# Altium PCB UC-520.PcbDoc
Units mil, origin at the board's own origin, x right, y up, seen from the top; angles counter-clockwise.
Board outline 1574.8 x 1574.8 mil, 4 copper layers (Top Layer, VCC_3.3V, GND, Bottom Layer); 61 components, 27 nets, 224 pads, 121 vias.
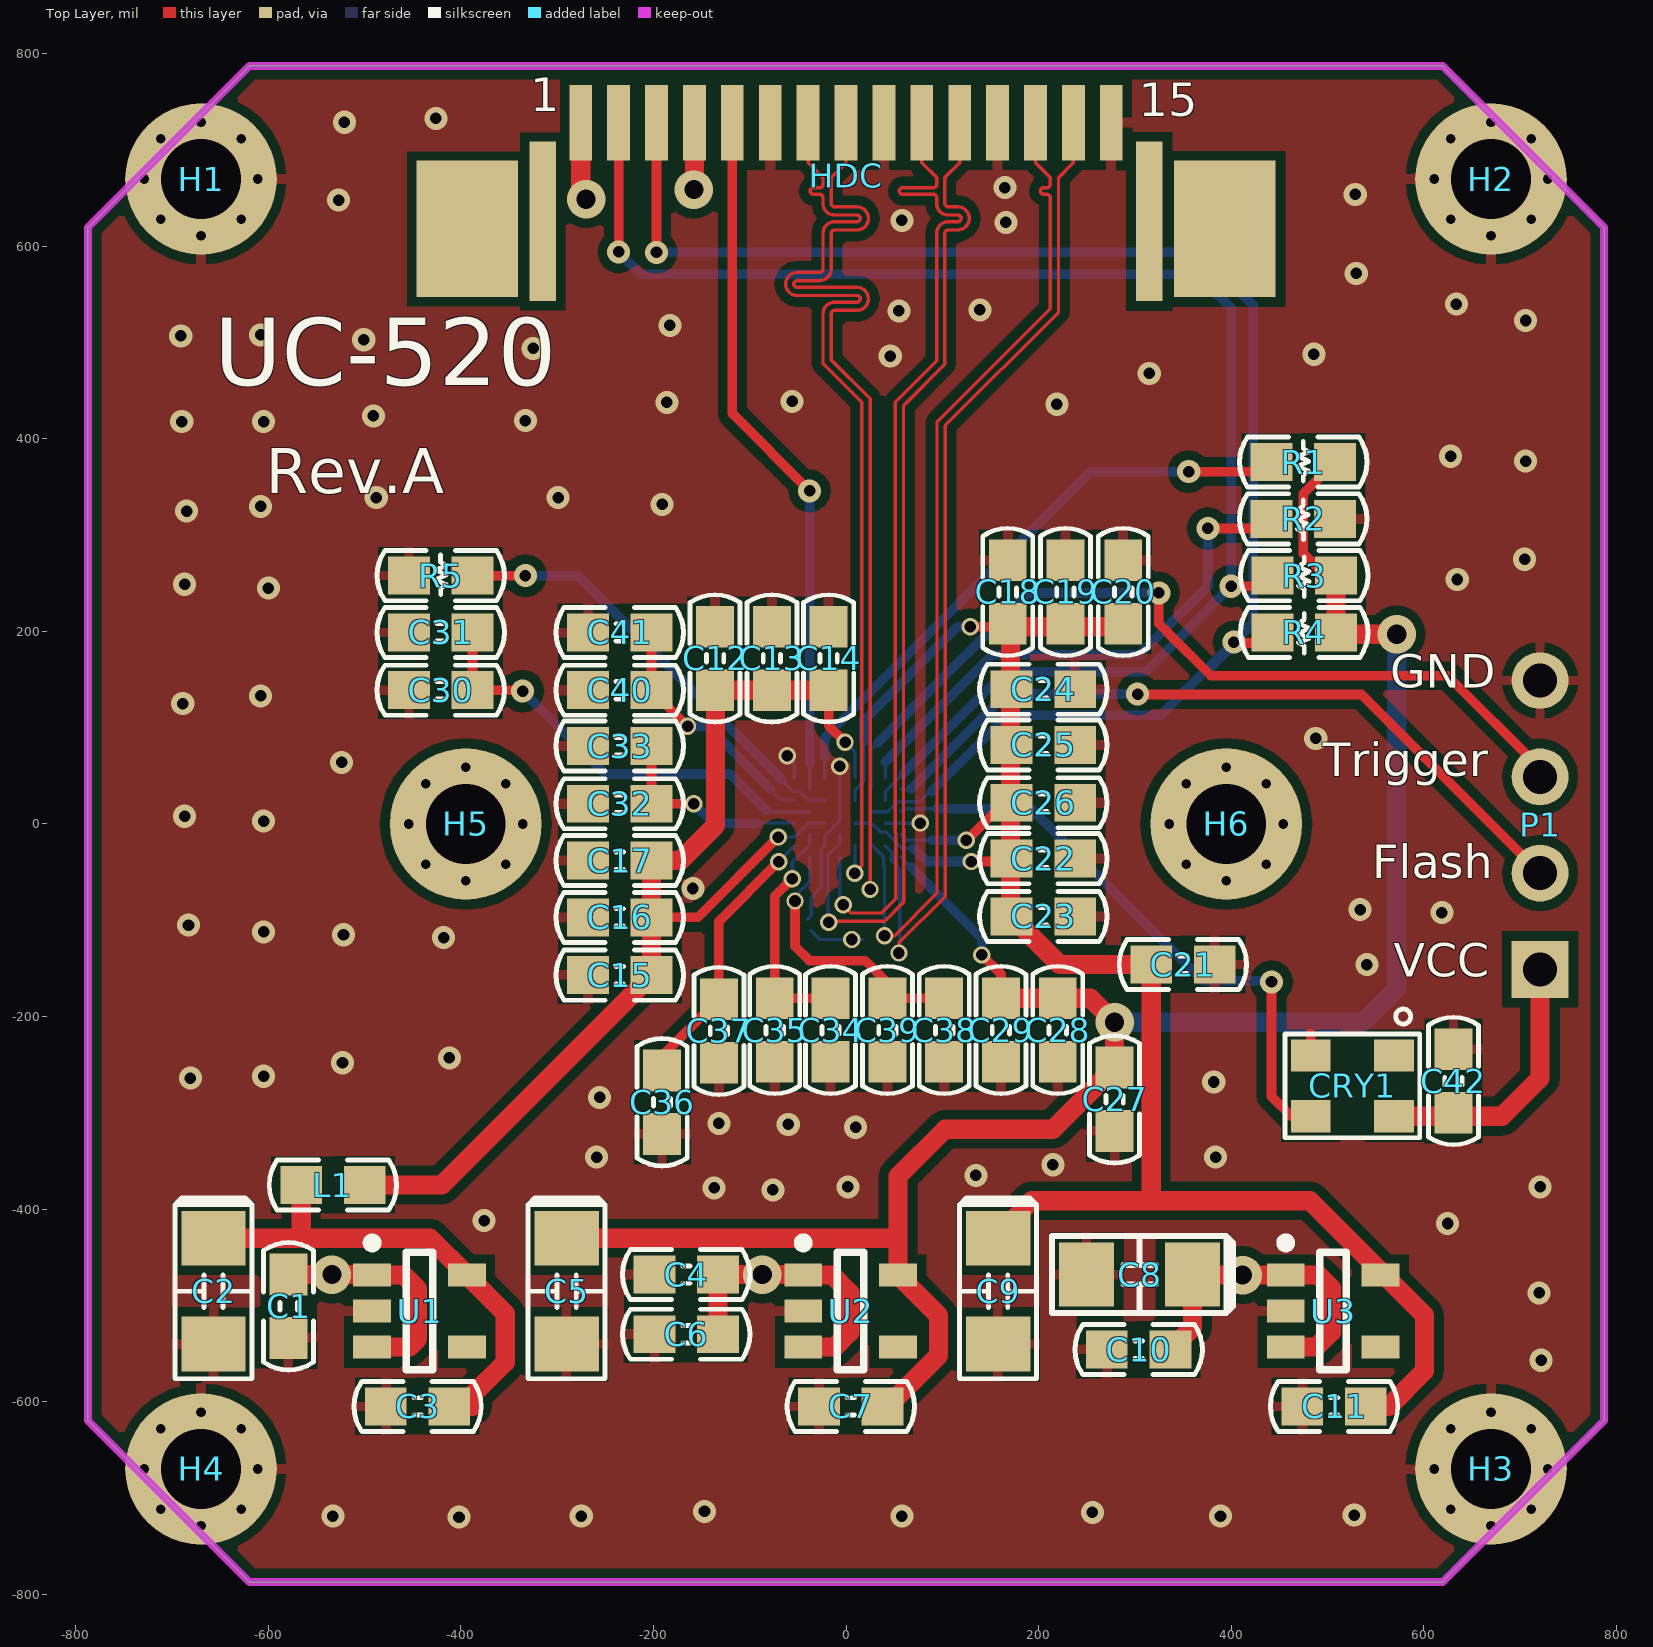
[diagram p0: Top Layer view]
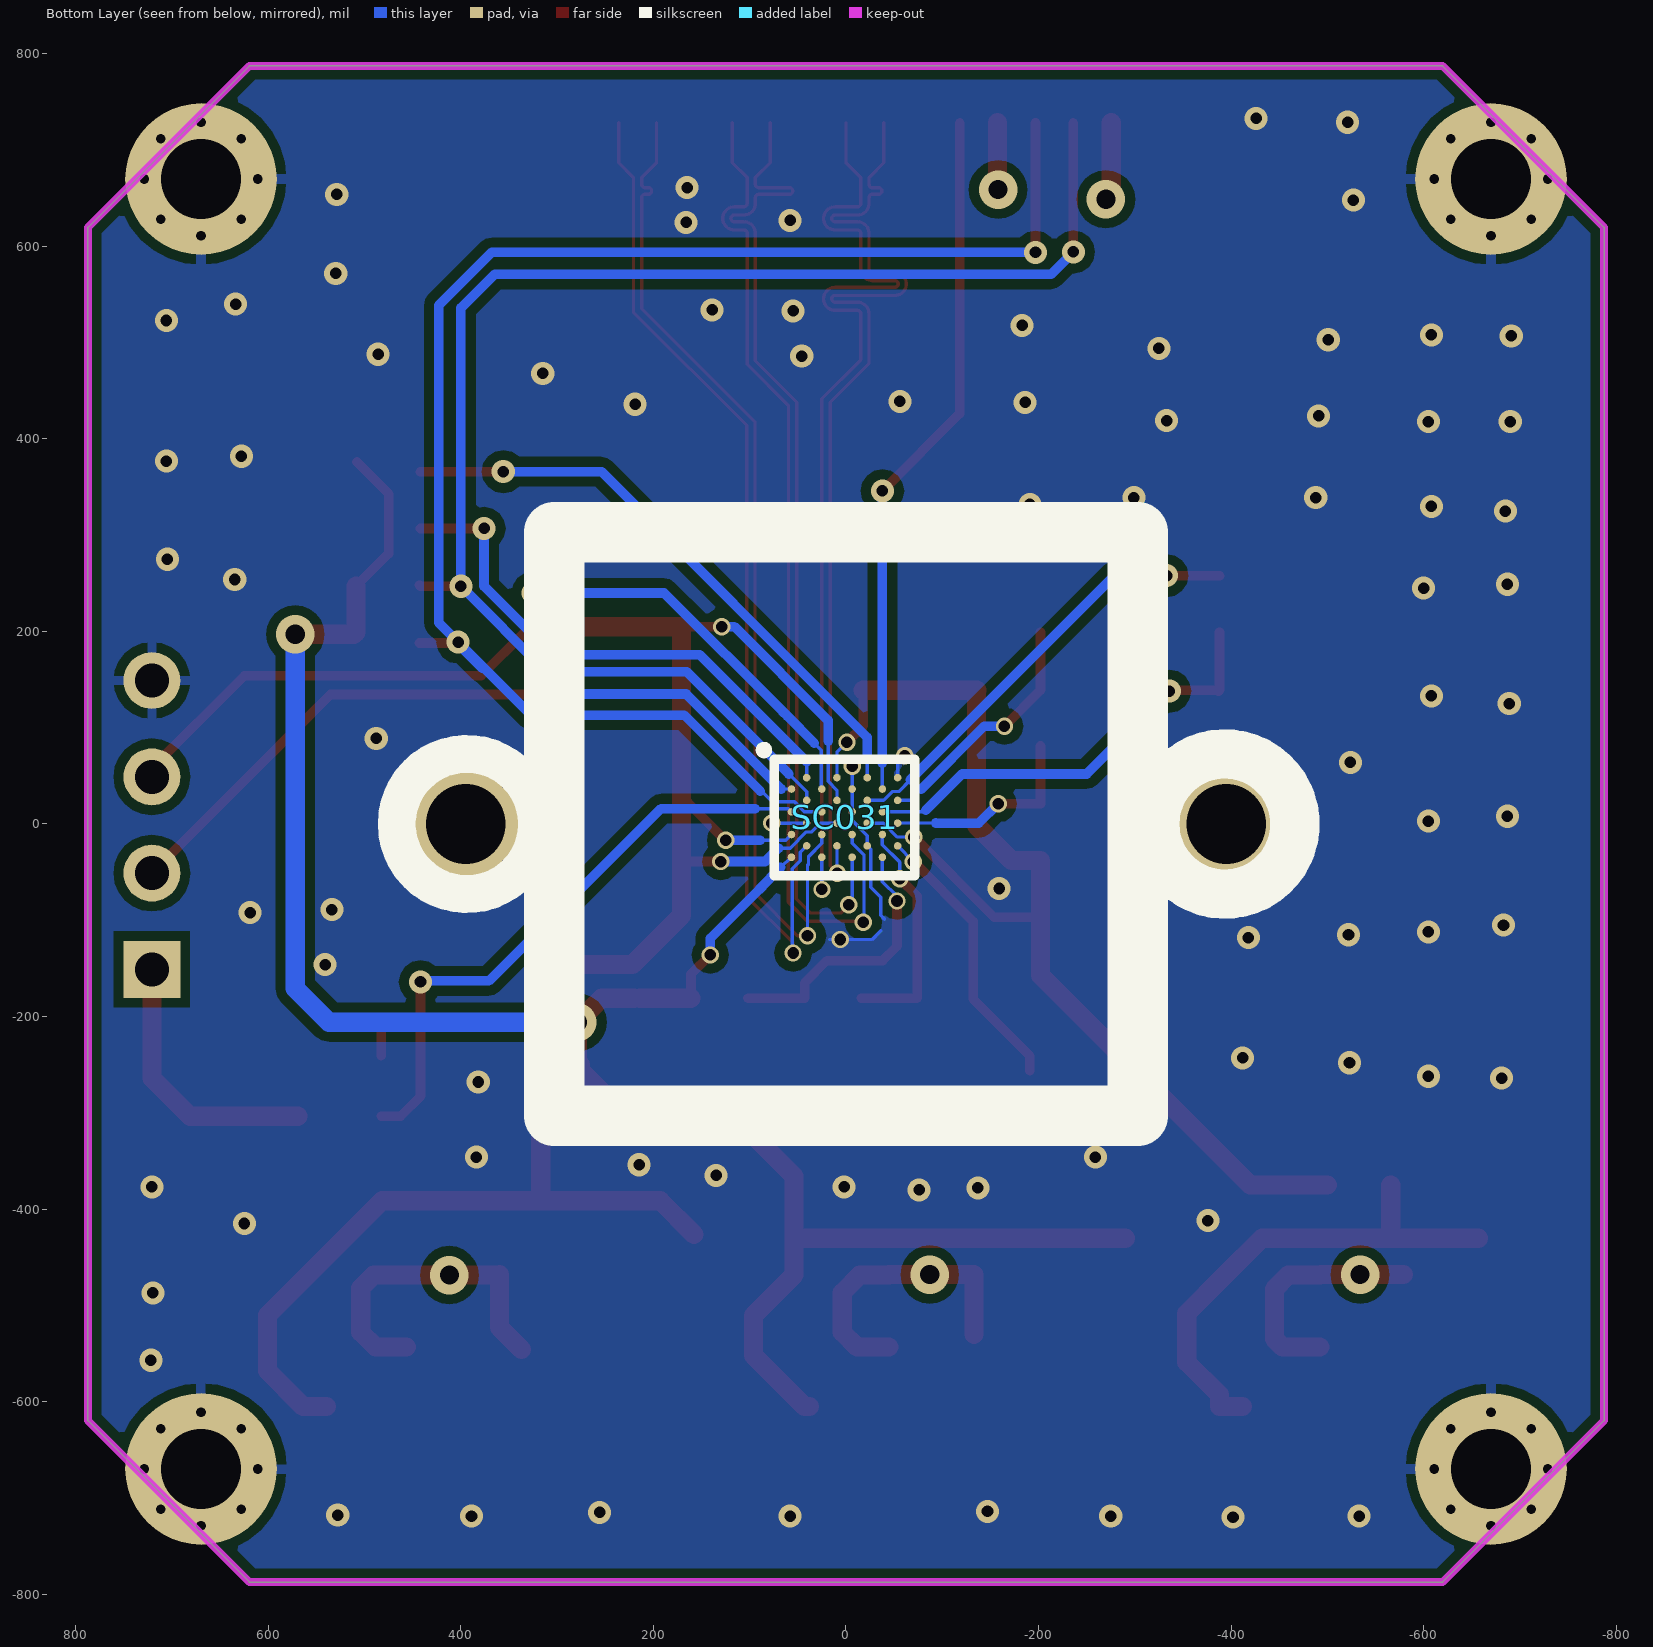
[diagram p1: Bottom Layer view, seen from below]
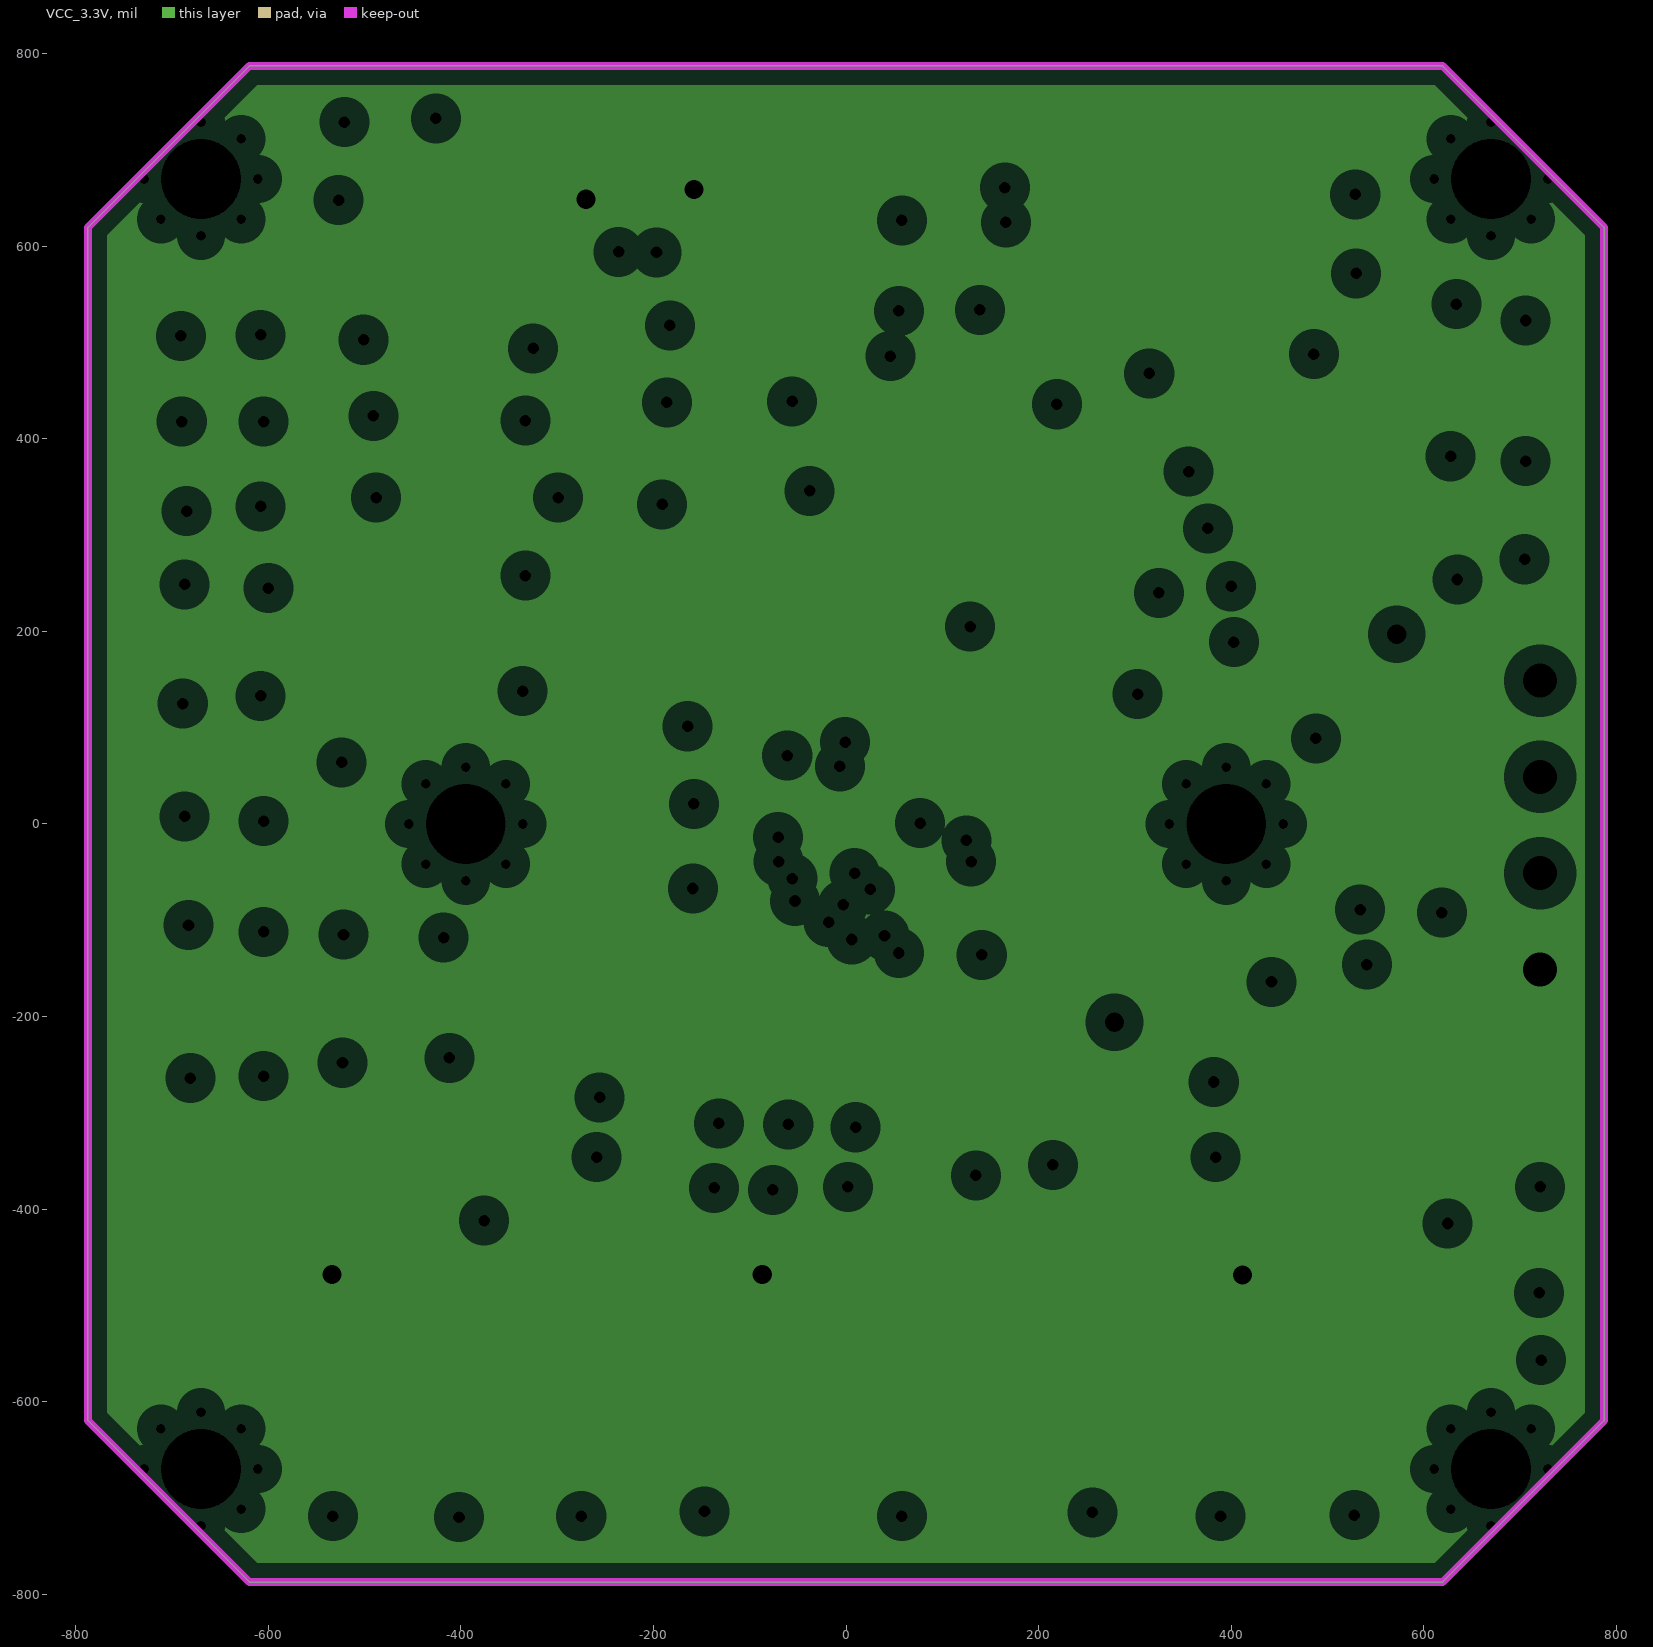
[diagram p2: VCC_3.3V, clearances drawn from the general rule]
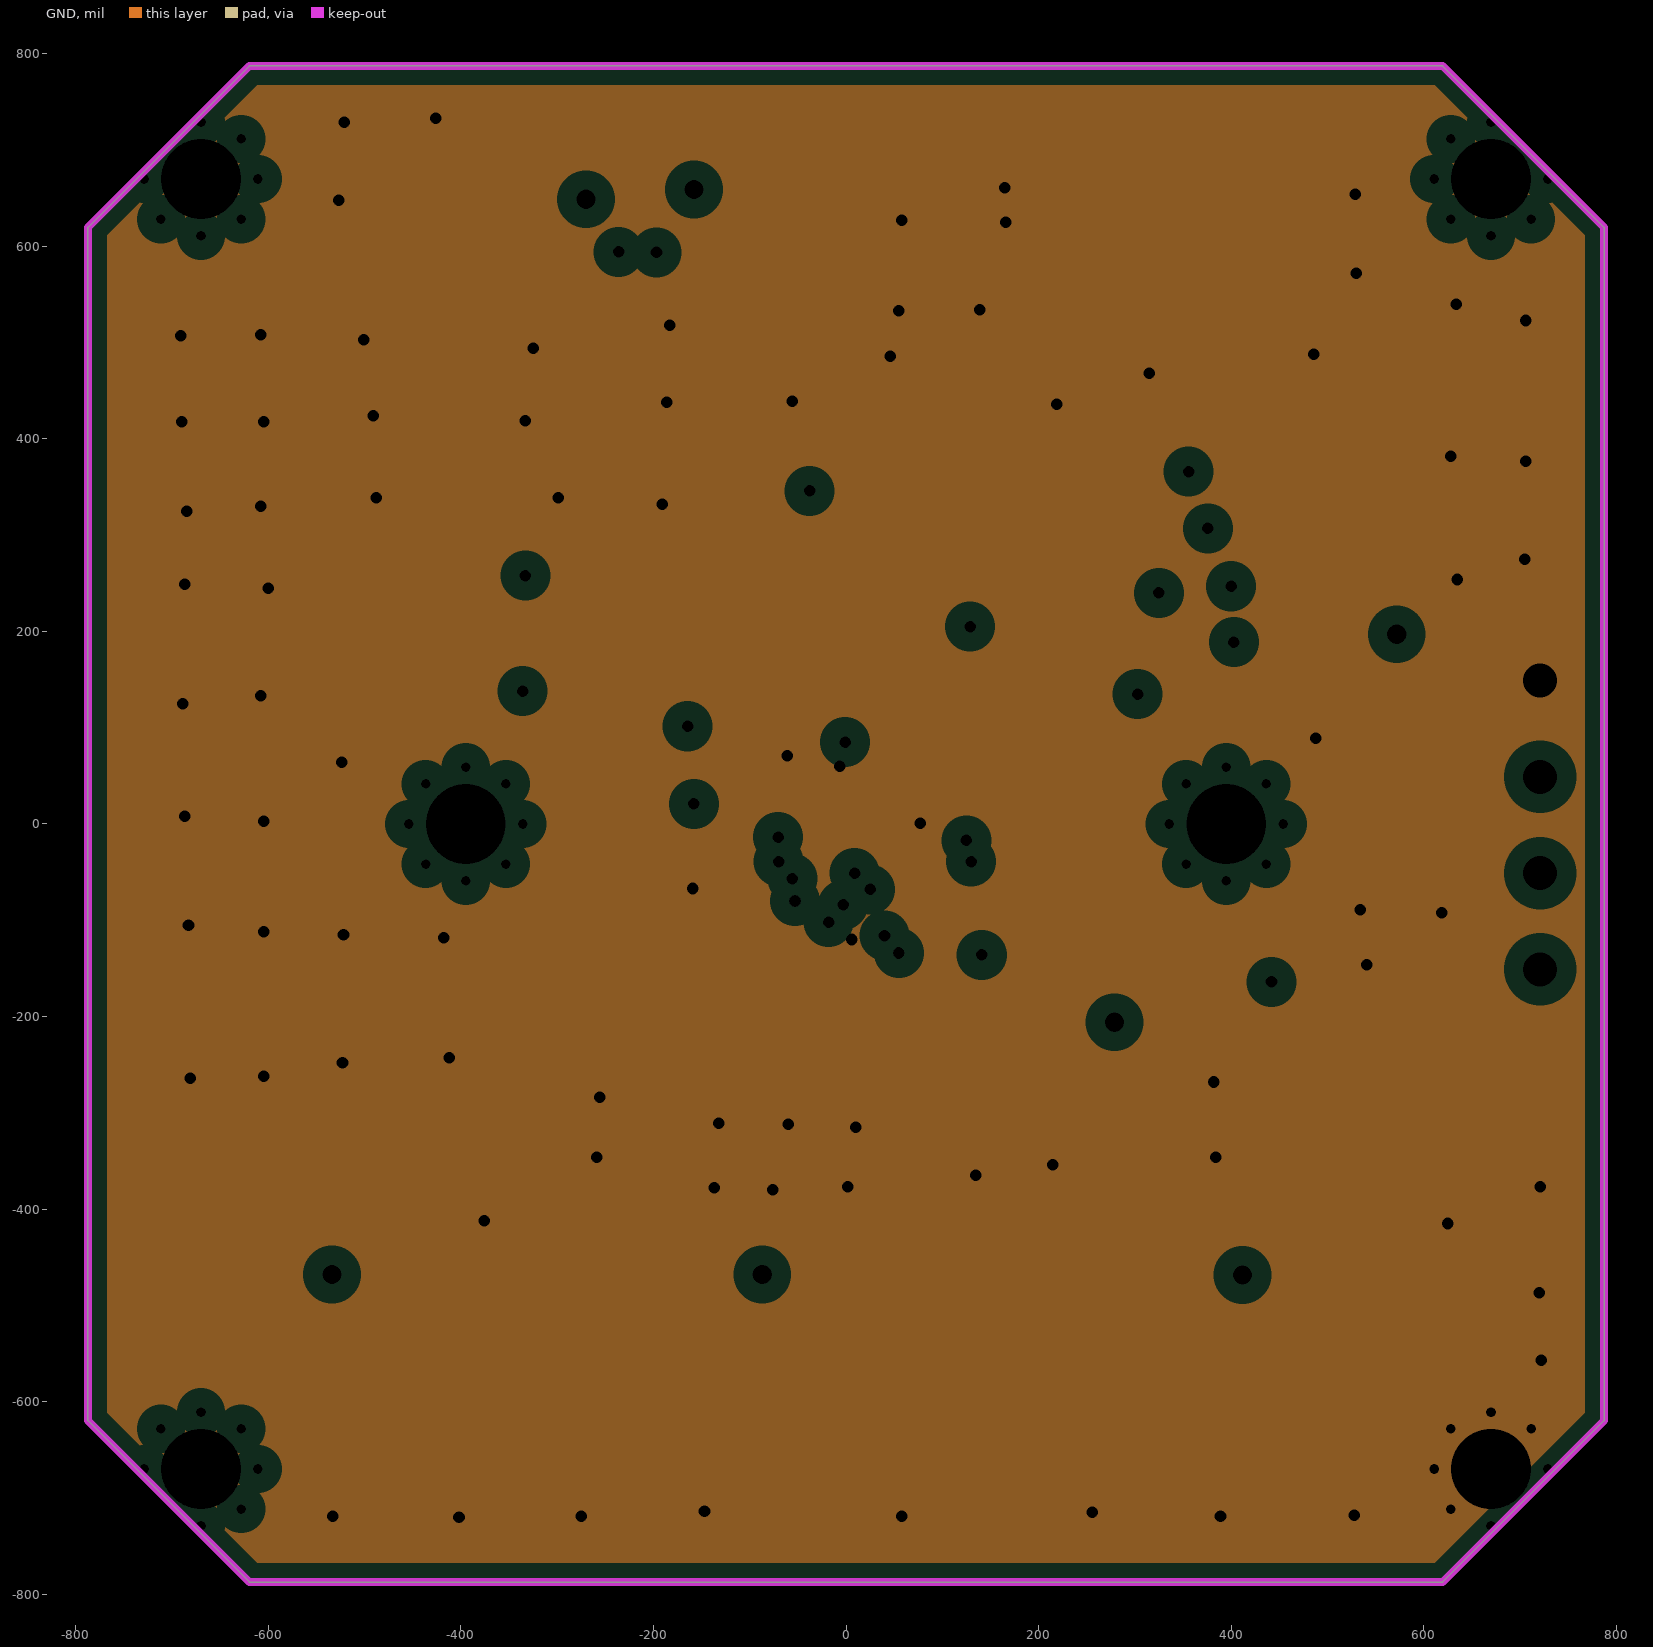
[diagram p3: GND, clearances drawn from the general rule]

## Layer stack, top to bottom
Top Layer: signal copper 1.4
Dielectric: prepreg 12.6, FR-4, Dk 4.8
VCC_3.3V: plane copper 1.4, net VCC_3.3V
Dielectric: core 12.6, FR-4, Dk 4.8
GND: plane copper 1.4, net DGND
Dielectric: prepreg 12.6, FR-4, Dk 4.8
Bottom Layer: signal copper 1.4

## Board outline
-787.4,-619.68 -787.4,619.68 -619.68,787.4 619.69,787.4 787.4,619.68 787.4,-619.68 619.69,-787.4 -619.68,-787.4

## Design rules (kind name [scope] priority, off if disabled: settings)
Clearance 铺铜安全间距 [InPolygon] p1: gap=10 // Protel DXP Scope 1 Expression Was: inpolygon
Clearance [All] p2: gap=3.5
ComponentClearance [All] p1: gap=0 collisioncheckmode=3 verticalgap=10 showdistances=FALSE
DiffPairsRouting [All] p1: maxlimit=5 minlimit=5 mostfreqgap=5 maxuncoupledlength=500
FabricationTestPointUsage TestPointUsage [All] p1: valid=0 allowmultiple=FALSE
FabricationTestpoint Testpoint [All] p1 off: side=3 testpointundercomponent=TRUE minsize=40 maxsize=100 preferedsize=60 minholesize=0 maxholesize=40 preferedholesize=32 testpointgrid=1 allowsidetop=TRUE allowsidebottom=TRUE usegrid=TRUE gridtolerance=0.01 // Protel DXP Scope 1 Expression Was: (IsPad And (OnTopLayer Or OnBottomLayer))
FanoutControl Fanout_Small [All] p1 off: bgadir=Out bgaviamode=Centered fanoutstyle=Auto fanoutdirection=Alternating viagrid=1 // Protel DXP Scope 1 Expression Was: (CompPinCount < 5)   Fanout_Small (Default Rule)
FanoutControl Fanout_Default [All] p2: bgadir=Out bgaviamode=Centered fanoutstyle=Auto fanoutdirection=Alternating viagrid=1 // Fanout_Default (Default Rule)
FanoutControl Fanout_SOIC [All] p3 off: bgadir=Out bgaviamode=Centered fanoutstyle=Auto fanoutdirection=Alternating viagrid=1 // Protel DXP Scope 1 Expression Was: IsSOIC   Fanout_SOIC (Default Rule)
FanoutControl Fanout_BGA [All] p4 off: bgadir=Out bgaviamode=Centered fanoutstyle=Auto fanoutdirection=Alternating viagrid=1 // Protel DXP Scope 1 Expression Was: IsBGA   Fanout_BGA (Default Rule)
FanoutControl Fanout_LCC [All] p5 off: bgadir=Out bgaviamode=Centered fanoutstyle=Auto fanoutdirection=Alternating viagrid=1 // Protel DXP Scope 1 Expression Was: IsLCC   Fanout_LCC (Default Rule)
PlaneClearance [All] p1: clearance=20
PlaneConnect [All] p1: planeconnectstyle=Relief reliefexpansion=20 reliefentries=4 reliefconductorwidth=10 reliefairgap=10
PolygonConnect via [ISVIA] p1: connectstyle=Direct reliefconductorwidth=10 reliefentries=4 polygonreliefangle="90 Angle"
PolygonConnect PolygonConnect_1 [All] p2 off: connectstyle=Relief reliefconductorwidth=25 reliefentries=4 polygonreliefangle="90 Angle" // Protel DXP Scope 1 Expression Was: IsVia
RoutingVias [All] p1: holewidth=10 width=15 viastyle="Through Hole" minholewidth=8 minwidth=5 maxholewidth=280 maxwidth=500
SilkscreenOverComponentPads [All] p1: minsilkscreentomaskgap=10
SolderMaskExpansion [All] p1: expansion=4
Width [All] p1: maxlimit=50 minlimit=3.5 preferedwidth=10
16 further rules are at their usual default settings.

## Classes and differential pairs
differential pair CSI_D1: +CSI_D1_P -CSI_D1_N
differential pair CSI_D0: +CSI_D0_P -CSI_D0_N
differential pair CSI_C: +CSI_C_P -CSI_C_N

## Components (designator, comment, footprint, x,y, rotation, side; value= is the part's Value field where it differs from the comment)
C1 "0.1uF" C0603 -579,-501 r90 top (schematic designator C3)
C2 "10uF/16V" 钽电容（A型） -657,-485.33 r270 top (schematic designator C1)
C3 "100nF" C0603 -445,-605 r0 top (schematic designator C2)
C4 "0.1uF" C0603 -166,-468 r0 top (schematic designator C7)
C5 "10uF/16V" 钽电容（A型） -290.22,-485.33 r270 top (schematic designator C4)
C6 "0.1uF" C0603 -166,-530 r0 top
C7 "100nF" C0603 5,-605 r0 top (schematic designator C5)
C8 "10uF/16V" 钽电容（A型） 305,-468 r180 top
C9 "10uF/16V" 钽电容（A型） 158,-485.33 r270 top (schematic designator C8)
C10 "0.1uF" C0603 304,-546 r0 top
C11 "100nF" C0603 507,-605 r0 top
C12 "22uF" C0603 -136,172 r90 top
C13 "100nF" C0603 -77,172 r90 top
C14 "10nF" C0603 -18,172 r90 top
C15 "22uF" C0603 -235,-157 r180 top
C16 "100nF" C0603 -235,-97 r180 top
C17 "10nF" C0603 -235,-38 r180 top
C18 "10uF" C0603 168,241 r90 top
C19 "100nF" C0603 228,241 r90 top
C20 "10nF" C0603 288,241 r90 top
C21 "10uF" C0603 350,-146 r0 top
C22 "100nF" C0603 205,-36 r0 top
C23 "10nF" C0603 205,-96 r0 top
C24 "10uF" C0603 205,140 r0 top
C25 "100nF" C0603 205,82.07 r0 top
C26 "10nF" C0603 205,22.07 r0 top
C27 "10uF" C0603 279,-286 r270 top
C28 "100nF" C0603 220,-214 r270 top
C29 "10nF" C0603 161,-214 r270 top
C30 "2.2uF" C0603 -421,139 r180 top
C31 "10nF" C0603 -421,199 r180 top
C32 "2.2uF" C0603 -235,21 r180 top
C33 "10nF" C0603 -235,81 r180 top
C34 "2.2uF" C0603 -16,-214 r270 top
C35 "10nF" C0603 -74,-214 r270 top
C36 "2.2uF" C0603 -191,-289 r270 top
C37 "10nF" C0603 -132,-215 r270 top
C38 "2.2uF" C0603 102,-214 r270 top
C39 "10nF" C0603 43,-214 r270 top
C40 "2.2uF" C0603 -235,139 r180 top
C41 "10nF" C0603 -235,199 r180 top
C42 "100nF" C0603 631,-267 r90 top
CRY1 "25M" 爱普生晶振3.2×2.5MM 526,-272 r180 top
H1 "FixedHole" HOLE_M2#1 -670,670 r90 top
H2 "FixedHole" HOLE_M2#1 670,670 r90 top
H3 "FixedHole" HOLE_M2#1 670,-670 r90 top
H4 "FixedHole" HOLE_M2#1 -670,-670 r90 top
H5 "FixedHole" HOLE_M2#2 -395,0 r90 top
H6 "FixedHole" HOLE_M2#2 395,0 r90 top
HDC "Header 15" OV5647_MIPI 0,673.29 r0 top locked
L1 "磁珠" L0603 -533,-375 r0 top
P1 "Header 4" HDR1X4 721,-151 r90 top locked
R1 "4.7K" R0603 475,376 r180 top
R2 "4.7K" R0603 475,317 r0 top
R3 "4.7K" R0603 476,258 r0 top
R4 "4.7K" R0603 476,199 r0 top
R5 "4.7K" R0603 -421,258 r180 top
SC031 "SC031" BGA32 0,0 r180 bottom locked
U1 "2.8VLDO" SOT23-5 -443,-506 r0 top
U2 "1.8VLDO" SOT23-5 4.78,-506 r0 top
U3 "1.5VLDO" SOT23-5 506,-506 r0 top

## Footprints (in the part's own frame and the unit in brackets; to place one, negate y for a bottom-side part, rotate by r counter-clockwise, add the part's x,y. Pads: shape width x height; smd on the part's side, far side on the other; paste and mask are expansions set on the pad)
BGA32 [mm]
  round 0.2 smd: A2(-1.039,1.223) A4(-0.239,1.223) A6(0.561,1.223) A8(1.361,1.223) B1(-1.439,0.923) B3(-0.639,0.923) B5(0.161,0.923) B7(0.961,0.923) C2(-1.039,0.623) C4(-0.239,0.623) C6(0.561,0.623) C8(1.361,0.623) D1(-1.439,0.323) D3(-0.639,0.323) D5(0.161,0.323) D7(0.961,0.323) E2(-1.039,0.023) E4(-0.239,0.023) E6(0.561,0.023) E8(1.361,0.023) F1(-1.439,-0.277) F3(-0.639,-0.277) F5(0.161,-0.277) F7(0.961,-0.277) G2(-1.039,-0.577) G4(-0.239,-0.577) G6(0.561,-0.577) G8(1.361,-0.577) H1(-1.439,-0.877) H3(-0.639,-0.877) H5(0.161,-0.877) H7(0.961,-0.877)
  silkscreen extent -2.26,-1.36 1.81,2.04
C0603 [mm]
  rect 1.1x1 smd: 1(0.838,0) 2(-0.838,0)
  silkscreen extent -1.68,-0.66 1.68,0.66
HDR1X4 [mm] "Connector; Header; 4 Position"
  rect 1.5x1.5 hole 0.9: 1(0,0)
  round 1.5 hole 0.9: 2(2.54,0) 3(5.08,0) 4(7.62,0)
HOLE_M2#1 [mil]
  round 15 hole 10: 0(-59.06,0) 0(-41.73,-41.73) 0(-41.73,41.73) 0(0,59.06) 0(0,-59.06) 0(41.73,-41.73) 0(41.73,41.73) 0(59.06,0)
  round 157.48 hole 82.68: 0(0,0)
HOLE_M2#2 [mil]
  round 15 hole 10: 0(-59.06,0) 0(-41.73,-41.73) 0(-41.73,41.73) 0(0,59.06) 0(0,-59.06) 0(41.73,-41.73) 0(41.73,41.73) 0(59.06,0)
  round 157.48 hole 82.68: 1(0,0)
L0603 [mm]
  rect 1.1x1 smd: 1(0.838,0) 2(-0.838,0)
  silkscreen extent -1.68,-0.66 1.68,0.66
OV5647_MIPI [mm]
  rect 2.68x3.6 smd: 0(-9.99,-1.4) 0(9.99,-1.4)
  rect 0.7x4.2 smd: 0(-8,-1.2) 0(8,-1.2)
  rect 0.6x2 smd: 1(-7,1.4) 2(-6,1.4) 3(-5,1.4) 4(-4,1.4) 5(-3,1.4) 6(-2,1.4) 7(-1,1.4) 8(0,1.4) 9(1,1.4) 10(2,1.4) 11(3,1.4) 12(4,1.4) 13(5,1.4) 14(6,1.4) 15(7,1.4)
R0603 [mm]
  rect 1.1x1 smd: 1(-0.838,0) 2(0.838,0)
  silkscreen extent -1.68,-0.66 1.68,0.66, body extent -0.8,-0.4 0.8,0.4, height 0.3
SOT23-5 [mm] "SOT23, 5-Leads, Body 3.1x3.0mm (max), Pitch 0.95mm, IPC Medium Density"
  rect 1x0.6 smd: 1(-1.25,0.95) 2(-1.25,0) 3(-1.25,-0.95) 4(1.25,-0.95) 5(1.25,0.95)
  silkscreen extent -1.37,-1.55 0.35,1.92, body extent -0.9,-1.55 0.9,1.55, height 1.1
爱普生晶振3.2×2.5MM [mm]
  rect 1.05x0.85 smd: 1(-1.1,-0.8) 2(1.1,-0.8) 3(1.1,0.8) 4(-1.1,0.8)
  Top Layer pour cut-out: -1.778,1.372 -1.778,-1.372 1.778,-1.372 1.778,1.372
  silkscreen extent -1.78,-2.03 1.78,1.37
钽电容（A型） [mm]
  rect 1.45x1.7 smd: 1(-1.397,0) 2(1.397,0)
  silkscreen extent -2.46,-1.02 2.31,1.02

## Part data
C1 C3 C4 C6 C7 C10 C11 C12 C13 C14 C15 C16 C17 C18 C19 C20 C21 C22 C23 C24 C25 C26 C27 C28 C29 C30 C31 C32 C33 C34 C35 C36 C37 C38 C39 C40 C41 C42: library part Cap, "Capacitor"
C2 C5 C8 C9: library part "Cap Pol2", "Polarized Capacitor (Axial)"
CRY1: library part 24M
H1 H2 H3 H4 H5 H6: library part 固定孔
HDC: "Header, 15-Pin"
L1: library part RES
P1: "Header, 4-Pin"
R1 R2 R3 R4 R5: library part Res2, "Resistor"
U2 U3: library part 2.8VLDO

## Via types
v1: diameter 24, hole 12, Top Layer to Bottom Layer, tented both sides, 93 vias
v2: diameter 18, hole 12, Top Layer to Bottom Layer, tented both sides, 21 vias
v3: diameter 40, hole 20, Top Layer to Bottom Layer, tented both sides, 7 vias

## Nets (pads, with @x,y where several pads share a name; then routed paths per layer and width w, separated by ;. In a path a pad name is that pad's centre, name@x,y a point inside that pad or via, vN(x,y) a via of type N, cw(c..) or ccw(c..) an arc to the next point about the centre after c; other vN are vias at no path point)
AVDD_2.8V: C12.2 C13.2 C14.2 C15.2 C16.2 C17.2 L1.1 SC031.A4 SC031.E6 | length 1177.9
  Top Layer w10: C16.2 -154,-97 v2(-70.54,-13.54) ; C14.2 -18,102 v2(-1,85)
  Top Layer w20: L1.1 -420,-375 C15.2 C16.2 C17.2 -172,-38 -135.5,-1.5 -135.5,138.5 C12.2 C13.2 C14.2
  Bottom Layer w3.5: v2(-70.54,-13.54) -53.45,-13.54 -39.02,0.89 SC031.E6 ; v2(-1,85) 9.41,74.59 9.41,63 ; SC031.A4 9.41,63 ; 9.41,70.59 9.41,63
CSI_C_N: HDC.8 SC031.H3 | length 1054.1
  Top Layer w3.5: HDC.8 0,687 -15.43,671.57 -15.43,650.56 -15.43,644.56 ccw(c-11.93,644.56) -11.93,641.06 11.33,641.06 cw(c11.33,629.06) 23.33,629.06 cw(c11.33,629.06) 11.33,617.06 -11.93,617.06 ccw(c-11.93,613.56) -15.43,613.56 -15.43,598 -15.43,576.5 cw(c-27.43,576.5) -27.43,564.5 -50.7,564.5 ccw(c-50.7,561) -50.7,557.5 11.33,557.5 cw(c11.33,545.5) 23.33,545.5 cw(c11.33,545.5) 11.33,533.5 -11.93,533.5 ccw(c-11.93,530) -15.43,530 -15.43,482 25,441.57 v2(25,-68) v2@24,-67
  Bottom Layer w3.5: v2@24.75,-67.75 v2(25,-68) 25.16,-67.84 SC031.H3
CSI_C_P: HDC.7 SC031.G4 | length 1054.1
  Top Layer w3.5: HDC.7 -39.37,687 -23.93,671.56 -23.93,668.06 -23.93,664.56 cw(c-27.43,664.56) -27.43,661.06 -33.81,661.06 ccw(c-33.81,657.56) -37.31,657.56 ccw(c-33.81,657.56) -33.81,654.06 -27.43,654.06 cw(c-27.43,650.56) -23.93,650.56 -23.93,644.56 ccw(c-11.93,644.56) -11.93,632.56 11.33,632.56 cw(c11.33,629.06) 14.83,629.06 cw(c11.33,629.06) 11.33,625.56 -11.93,625.56 ccw(c-11.93,613.56) -23.93,613.56 -23.93,598 -23.93,576.5 cw(c-27.43,576.5) -27.43,573 -50.7,573 ccw(c-50.7,561) -50.7,549 11.33,549 cw(c11.33,545.5) 14.83,545.5 cw(c11.33,545.5) 11.33,542 -11.93,542 ccw(c-11.93,530) -23.93,530 -23.93,478.48 16.5,438.04 16.5,-43.5 v2(9,-51)
  Bottom Layer w3.5: v2(9,-51) 9.41,-50.59 SC031.G4
CSI_D0_N: HDC.14 SC031.G2 | length 1054.1
  Top Layer w3.5: v2(55,-134) 55,-123.44 103,-75.44 103,413.98 220.79,531.76 220.79,671.57 236.22,687 HDC.14
  Bottom Layer w3.5: SC031.G2 47.47,-29.29 47.47,-38.35 55.75,-46.63 v2@55.75,-133.25
CSI_D0_P: HDC.13 SC031.F3 | length 1054.1
  Top Layer w3.5: v2(40,-116) 50.42,-116 94.5,-71.92 94.5,417.5 212.29,535.29 212.29,636 212.29,650.57 ccw(c208.79,650.57) 208.79,654.07 205.46,654.07 cw(c205.46,657.57) 201.96,657.57 cw(c205.46,657.57) 205.46,661.07 208.79,661.07 ccw(c208.79,664.57) 212.29,664.57 212.29,668.07 212.29,671.57 196.85,687 HDC.13
  Bottom Layer w3.5: SC031.F3 25.16,-19.97 38.97,-33.78 38.97,-41.87 40,-42.9 v2(40,-116)
CSI_D1_N: HDC.11 SC031.F5 | length 1054.3
  Top Layer w3.5: v2(-18,-102) -17,-101 40.02,-101 60,-81.02 60,-6.15 59.75,-5.9 59.75,434.73 102.68,477.65 102.68,602 102.68,613.57 cw(c106.18,613.57) 106.18,617.07 116.04,617.07 ccw(c116.04,629.07) 128.04,629.07 ccw(c116.04,629.07) 116.04,641.07 106.18,641.07 cw(c106.18,644.57) 102.68,644.57 102.68,650.57 102.68,671.57 118.11,687 HDC.11
  Bottom Layer w3.5: v2(-18,-102) -18.75,-101.25 -18.75,-32.38 -6.34,-19.97 SC031.F5
CSI_D1_P: HDC.10 SC031.H5 | length 1054.3
  Top Layer w3.5: v2(-3,-84) 5.5,-92.5 36.5,-92.5 51.5,-77.5 51.5,-9.67 51.25,-9.42 51.25,438.25 94.18,481.18 94.18,602 94.18,613.57 cw(c106.18,613.57) 106.18,625.57 116.04,625.57 ccw(c116.04,629.07) 119.54,629.07 ccw(c116.04,629.07) 116.04,632.57 106.18,632.57 cw(c106.18,644.57) 94.18,644.57 94.18,650.57 ccw(c90.68,650.57) 90.68,654.07 58.84,654.07 cw(c58.84,657.57) 55.34,657.57 cw(c58.84,657.57) 58.84,661.07 90.68,661.07 ccw(c90.68,664.57) 94.18,664.57 94.18,671.57 78.74,687 HDC.10
  Bottom Layer w3.5: SC031.H5 -6.34,-80.66 v2(-3,-84)
DGND: C1.2 C2.2 C3.2 C4.2 C5.2 C6.2 C7.2 C8.2 C9.2 C10.2 C11.2 C12.1 C13.1 C14.1 C15.1 C16.1 C17.1 C18.1 C19.1 C20.1 C21.1 C22.1 C23.1 C24.1 C25.1 C26.1 C27.1 C28.1 C29.1 C30.1 C31.1 C32.1 C33.1 C34.1 C35.1 C36.1 C37.1 C38.1 C39.1 C40.1 C41.1 C42.1 CRY1.2 H1.0@-670,670 H2.0@670,670 H3.0 H4.0@-670,-670 HDC.6 HDC.9 HDC.12 HDC.15 P1.4 R2.2 R5.2 SC031.A8 SC031.B5 SC031.D5 SC031.E2 SC031.G6 U1.2 U2.2 U3.2 | length 317.9
  Top Layer w10: CRY1.2 482.69,-217.31
  Bottom Layer w3.5: v2(-61,71) -53.58,63.58 SC031.A8 ; -40,-99 -36,-95 -36,-76 -25.75,-65.75 -25.75,-26.39 SC031.G6 -22.09,-12.1 -6.34,3.65 SC031.D5 SC031.B5 v2(-6.34,60) ; -36,-111 -27,-120 17,-120 ; SC031.E2 76.89,0.89 v2(77,1) v2@80,1
  other v1: -402,-720 -533,-719 -275,-719 58,-719 389,-719 528,-718 256,-715 -147,-714 722,-557 720,-487 625,-415 -376,-412 -76,-380 -137,-378 2,-377 721,-377 135,-365 215,-354 -259,-346 384,-346 10,-315 -60,-312 -132,-311 -256,-284 382,-268 -681,-264 -605,-262 -523,-248 -412,-243 541,-146 -418,-118 -522,-115 -605,-112 -683,-105 619,-92 534,-89 -159,-67 -605,3 -687,8 -524,64 488,89 -689,125 -608,133 -600,245 -687,249 635,254 705,275 -685,325 -608,330 -191,332 -488,339 -299,339 706,377 628,382 -690,418 -605,418 -333,419 -491,424 219,436 -186,438 -56,439 315,468 46,486 486,488 -325,494 -501,503 -691,507 -608,508 -183,518 706,523 55,533 139,534 634,540 530,572 166,625 58,627 -527,648 529,654 165,661 -521,729 -426,733
  other v2: 6,-120
DOVDD_1.8V: C5.1 C7.1 C27.2 C28.2 C29.2 R1.1 R3.2 R4.2 SC031.H1 U2.5 | length 2213.9
  Top Layer w10: v2(141,-136) 161,-156 C29.2 ; R1.1 475.1,343.1 475.1,280.9 R3.2@509,247
  Top Layer w20: C5.1 53.33,-430.33 ; C7.1 42.98,-605 96,-551.98 96,-510.61 U2.5 53.99,-366.01 103,-317 215,-317 C27.2 ; C29.2 C28.2@214.43,-181 ; C28.2 254,-181 v3(279,-206) C27.2 ; C27.2@276,-250 C27.2 ; C27.2@279,-245.57 C27.2 ; R3.2@509,247 R4.2 511,197 v3(572,197)
  Bottom Layer w3.5: SC031.H1 68,-45
  Bottom Layer w10: 68,-45 90.11,-68 141,-118.89 v2(141,-136)
  Bottom Layer w20: v3(279,-206) 537,-206 572,-171 v3(572,197)
DVDD_1.5V: C9.1 C11.1 C18.2 C19.2 C20.2 C21.2 C22.2 C23.2 C24.2 C25.2 C26.2 SC031.C4 SC031.E4 SC031.F1 U3.5 | length 2481.2
  Top Layer w10: v2(125,-17) 164.07,22.07 171,22.07 C26.2 ; v2(129,205) C18.2@171,205 ; v2(130,-39) 169,-39 171,-37 C22.2 ; C23.2 C22.2 ; C20.2@284,204 172,204 C24.2 C25.2 C26.2 ; C22.2 C26.2
  Top Layer w20: C9.1@158,-426.33 193,-391.33 319,-391.33 ; C20.2 285,205 171,205 171,22.07 171,-37 171,-95 C23.2 221.85,-145.85 316.85,-145.85 C21.2 ; C21.2@319,-148 C21.2 ; C11.1 564,-605 601,-568 601,-510.39 555.21,-464.6 481.95,-391.33 319,-391.33 ; C21.2 317,-389.33 319,-391.33
  Bottom Layer w3.5: SC031.E4 26.34,0.89 35.52,-8.3 41.3,-8.3 58,-25 70,-25 ; SC031.C4 9.41,35.14 18.6,44.33 18.6,86 ; SC031.F1 62.73,-17 89,-17
  Bottom Layer w10: 18.6,86 18.6,107.6 116,205 v2(129,205) ; 70,-25 84,-39 v2(130,-39) ; 89,-17 v2(125,-17)
FLASH: P1.2 SC031.B1 | length 782.3
  Top Layer w10: v1(303,135) 303.5,134.5 535.5,134.5 P1.2
  Bottom Layer w3.5: SC031.B1 67.32,36.32
  Bottom Layer w10: 67.32,36.32 166,135 v1(303,135)
I2C_SCL: HDC.3 R4.1 SC031.D3 | length 1663.5
  Top Layer w10: v1(-196.85,593.85) HDC.3 ; v1(403,189) 404,188 R4.1@443,188
  Bottom Layer w3.5: SC031.D3 43.2,12.7 53.5,23 76.5,23 87.5,34 89,34
  Bottom Layer w10: v1(-196.85,593.85) 368.15,593.85 423,539 423,209 v1(403,189) 327,113 168,113 89,34 ; 378,162 v1@404,188
I2C_SDA: HDC.2 R3.1 SC031.C2 | length 1583.5
  Top Layer w10: v1(-236.22,594.22) HDC.2 ; v1(400,247) 442,247 R3.1@443,248
  Bottom Layer w3.5: SC031.C2 40.9,33.57 59.34,52
  Bottom Layer w10: v1(-236.22,594.22) -213,571 365,571 400,536 v1(400,247) 311,158 165.34,158 59.34,52
NetR1_2: R1.2 SC031.A6 | length 620.2
  Top Layer w10: v1(356,366) R1.2@442,366
  Bottom Layer w3.5: SC031.A6 -22.09,70
  Bottom Layer w10: -22.09,70 -22.09,89.91 254,366 v1(356,366)
NetR2_1: R2.1 SC031.A2 | length 553.3
  Top Layer w10: v1(376,307) R2.1@442,307
  Bottom Layer w3.5: SC031.A2 40.9,64.9
  Bottom Layer w10: 40.9,64.9 152,176 305,176 376,247 v1(376,307)
NetR5_1: R5.1 SC031.C6 | length 462.6
  Top Layer w10: R5.1 v1(-333,258)
  Bottom Layer w3.5: -67,46 -54.7,33.7 -48.2,33.7 -39.02,24.51 SC031.C6
  Bottom Layer w10: v1(-333,258) -279,258 -67,46
PWDN: HDC.5 SC031.B7 | length 725.3
  Top Layer w10: HDC.5 -118.11,426.27 v1(-37.84,346)
  Bottom Layer w3.5: SC031.B7 -37.84,63
  Bottom Layer w10: -37.84,63 v1(-37.84,346)
REF1: C30.2 C31.2 SC031.D7 | length 461.5
  Top Layer w10: C31.2 C30.2 ; C30.2@-387,138 C30.2 ; v1@-338,139 C30.2
  Bottom Layer w3.5: -83,14.39 -81.31,12.7 SC031.D7
  Bottom Layer w10: v1(-336,138) -250,52 -168,52 -120.61,52 -83,14.39
REF2: C32.2 C33.2 SC031.E8 | length 216.7
  Top Layer w10: C33.2 C32.2 v2(-158,21)
  Bottom Layer w3.5: -93.29,0.98 SC031.E8
  Bottom Layer w10: v2(-158,21) -137.89,0.89 -93.29,0.98
REF3: C34.2 C35.2 SC031.F7 | length 243.1
  Top Layer w10: v2(-55.75,-56.75) -74,-75 C35.2 C34.2
  Bottom Layer w3.5: v2(-55.75,-56.75) -55.75,-39.46 -37.84,-21.55 SC031.F7
REF4: C36.2 C37.2 SC031.G8 | length 290.2
  Top Layer w10: C36.2 -191,-241 C37.2 -132,-101.15 v2(-70,-39.15)
  Bottom Layer w3.5: v2(-70,-39.15) SC031.G8
REF5: C38.2 C39.2 SC031.H7 | length 285.5
  Top Layer w10: v2(-53,-80) -53,-127 -38,-142 20,-142 43,-165 C39.2 C38.2
  Bottom Layer w3.5: v2(-53,-80) -53,-75 -37.84,-59.84 SC031.H7
RST: C40.2 C41.2 SC031.C8 | length 257.8
  Top Layer w10: C41.2 C40.2 v2(-164.56,101.56)
  Bottom Layer w3.5: -78,36 -66.51,24.51 SC031.C8 ; SC031.C8@-55.41,24.51 SC031.C8 ; SC031.C8@-53.71,24.64 SC031.C8
  Bottom Layer w10: v2(-164.56,101.56) -143.56,101.56 -78,36
TRIGGER: P1.3 SC031.B3 | length 978.8
  Top Layer w10: v1(325,240) 325,208 379,154 ; 333,200 379,154 ; P1.3 721,58 625,154 379,154
  Bottom Layer w3.5: SC031.B3 25.6,36.76 25.6,76.6 33,84
  Bottom Layer w10: 33,84 61,112 ; 66,117 61,112 ; v1(325,240) 189,240 61,112
VCC_2.8V: C2.1 C3.1 L1.2 U1.5 | length 524.4
  Top Layer w20: C2.1 -432.05,-430.33 U1.5 -354,-508.39 -354,-559 -388,-593 -388,-605 C3.1 ; -566,-429.33 L1.2
VCC_3.3V: C1.1 C4.1 C6.1 C8.1 C10.1 C42.2 CRY1.4 HDC.1 HDC.4 P1.1 U1.1 U1.3 U2.1 U2.3 U3.1 U3.3 | length 1313.8
  Top Layer w20: C1.1 U1.1@-492.81,-468 ; U1.3 -453.4,-543.4 -445,-535 -445,-483 -459.4,-468.6 U1.1 ; HDC.1 -275.59,654.59 v3(-270,649) ; v3(-158,659) -157.48,659.52 HDC.4 ; C6.1 C4.1 v3(-87,-468) U2.1@-44.43,-468 ; U2.3 -11.4,-543.4 4,-528 4,-487 -14.4,-468.6 U2.1 ; C10.1 360,-523 C8.1 360.6,-468.6 v3(412,-468.6) U3.1 490.6,-468.6 504,-482 504,-528 488.6,-543.4 U3.3 ; CRY1.4 681.5,-303.5 721,-264 P1.1
  other v3: -534,-468
XCK_IO: CRY1.3 SC031.D1 | length 629
  Top Layer w10: v1(442,-164) 442,-283 462.5,-303.5 CRY1.3
  Bottom Layer w3.5: SC031.D1 59.95,16 94.5,16
  Bottom Layer w10: 94.5,16 192,16 371,-163 v1@442,-163
pads on no net: CRY1.1 H1.0@-610.94,670 H1.0@-628.27,628.27 H1.0@-628.27,711.73 H1.0@-670,610.94 H1.0@-670,729.06 H1.0@-711.73,628.27 H1.0@-711.73,711.73 H1.0@-729.06,670 H2.0@610.94,670 H2.0@628.27,628.27 H2.0@628.27,711.73 H2.0@670,610.94 H2.0@670,729.06 H2.0@711.73,628.27 H2.0@711.73,711.73 H2.0@729.06,670 H4.0@-610.94,-670 H4.0@-628.27,-628.27 H4.0@-628.27,-711.73 H4.0@-670,-610.94 H4.0@-670,-729.06 H4.0@-711.73,-628.27 H4.0@-711.73,-711.73 H4.0@-729.06,-670 H5.0 H5.1 H6.0 H6.1 HDC.0 U1.4 U2.4 U3.4

## Polygon pours and split planes (outlines as drawn)
DGND on Bottom Layer "Mechanical 1-No Net 1" (solid, remove dead copper, pour order 1000): -787,-648 -787,648 -785,650 -648,787 648,787 787.5,647.5 787.5,-648.5 649,-787 -648,-787
DGND on Top Layer "Mechanical 1-No Net" (solid, remove dead copper, pour order 1001): -787,-648 -787,648 -785,650 -648,787 648,787 787.5,647.5 787.5,-648.5 649,-787 -648,-787
VCC_3.3V on VCC_3.3V (split plane): 767.3,611.36 767.3,-611.36 611.36,-767.3 -611.36,-767.3 -767.3,-611.36 -767.3,611.36 -611.36,767.3 611.36,767.3
DGND on GND (split plane): 767.3,611.36 767.3,-611.36 611.36,-767.3 -611.36,-767.3 -767.3,-611.36 -767.3,611.36 -611.36,767.3 611.36,767.3

## Keep-outs
Keep-Out Layer:
  the board outline again, w8

## Other copper
Top Layer:
  pour cut-out: 147,777 151,773 159,754 159,749 196,750 206,760 212,760 212,770 205,777

## Silkscreen, mask and mechanical layers (free items; w line width, h text height)
Top Overlay:
  text "1" at -328,729 h60
  text "15" at 304,724 h60
  text "UC-520" at -656,433 h120
  text "Rev.A" at -603,328 h80
  text "GND" at 565.37,130 h60
  text "Trigger" at 495,38 h60
  text "Flash" at 546.67,-68 h60
  text "VCC" at 568.87,-170 h60
Bottom Overlay:
  circle w39.37: c393.85,0 r72.83
  circle w51.18: c-393.55,0 r72.83
  lines w62.99: -303.15,-303.15 -303.15,303.15 303.15,303.15 303.15,-303.15 -303.15,-303.15
Mechanical 1:
  the board outline again, w8
Mechanical 2:
  circle w8: c609.72,187.63 r12.59
  circle w10: c670,670 r41.34
  circle w10: c670,-670 r41.34
  circle w10: c-670,-670 r41.34
  circle w10: c-670,670 r41.34
  circle w10: c393.7,0 r41.34
  circle w10: c-393.7,0 r41.34
  lines w7.87: 626.63,156.11 626.63,85.71 ; 627.06,156.11 646.93,136.24 653.4,142.72 627.92,168.2 ; 627.06,168.2 587.76,168.2 562.28,142.72 568.32,136.67 588.19,156.54 588.19,85.71 602.01,85.71 602.01,112.48 612.81,112.48 612.81,85.71 626.63,85.71 ; 626.63,85.71 626.63,85.71 ; 545,68 545,213.55 673.27,213.55 673.27,68 545,68
  lines w8: -787,648 -785,650 ; -787.4,-647.6 -787.4,647.6 -647.6,787.4 647.6,787.4 787.4,647.6 787.4,-647.6 647.6,-787.4 -647.6,-787.4 -787.4,-647.6
  lines w62.99: -303.15,-303.15 303.15,-303.15 303.15,303.15 -303.15,303.15 -303.15,-303.15

## Dimensions
670,674 to -670,654 on Mechanical 2
-690,-670 to -684,670 on Mechanical 2
670,670 to 811,759 on Mechanical 2
393.7,-6 to -393.7,-23 on Mechanical 2
-670,-670 to -787.4,-647.6 on Mechanical 2
-670,-670 to -647.6,-787.4 on Mechanical 2
-647.6,787.4 to -647.6,-787.4 on Mechanical 2
-787.4,647.6 to 787.4,647.6 on Mechanical 2